# EAGLE board 1206LED-breakout (EAGLE 9.1.3)
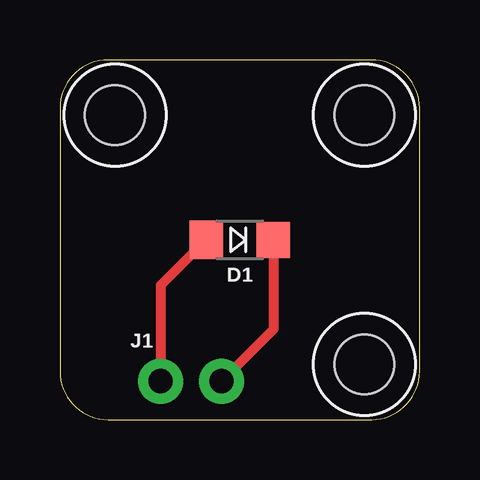
[diagram p0: board, top side]

Size 15 x 15 mm. Coordinates in mm from the lower left corner, seen from the top.
Outline: 2,0 13,0 arc90 15,2 15,13 arc90 13,15 2,15 arc90 0,13 0,2 arc90 2,0
Copper layers (1*16): Top 0.035559375mm / dielectric 1.6mm / Bottom 0.035559375mm
Design rules "oshpark-2layer": minimum track width 6mil, minimum drill 10mil, track to track 6mil, track to pad 6mil, pad to pad 6mil, via to via 6mil, smd to smd 6mil, copper to edge 15mil, drill to drill 6mil, minimum pad ring 5mil, minimum via ring 5mil, stop-mask expansion 2.5mil, vias tented up to drill 0mil, thermal gap 10mil

## Footprints (pad centres in the part's own frame; a part is rotated, then mirrored left to right if it is on the bottom)
LED_1206 = smd 1.4 x 1.6: ANODE 1.4,0 | smd 1.4 x 1.5: CATHODE -1.4,0
2_56 = hole 2.5: 0,0
1X02_NO_SILK = drill 1.016 pad 1.88: 1 0,0; 2 2.54,0

## Placement (x,y rotation side)
D1  LED1206  [LED_1206]  7.5,7.5 180 top
H1  [2_56]  2.3,12.7 0 top
H2  [2_56]  12.7,2.3 0 top
H3  [2_56]  12.7,12.7 0 top
J1  [1X02_NO_SILK]  4.2,1.6 0 top

## Library data of the parts
D1 H1-H3 J1 = bschulz

## Nets
ANODE: D1.ANODE J1.1
CATHODE: D1.CATHODE J1.2

## Tracks (layer width: path | path; a pad name or v marks a point on that pad's centre or on a via)
ANODE
  Top 0.406: D1.ANODE 4.2,5.6 J1.1
CATHODE
  Top 0.406: D1.CATHODE 8.9,3.76 J1.2

## Text on the board
bDocu: Anode (+) | Cathode (-)